# Altium PCB PATTERN-GENERATOR-NODE-NOCTRL-PCB.PcbDoc
Units mm, origin at the board's own origin, x right, y up, seen from the top; angles counter-clockwise.
Board outline 100.5 x 100.5 mm, 2 copper layers (Top Layer, Bottom Layer); 36 components, 19 nets, 113 pads, 6 vias.
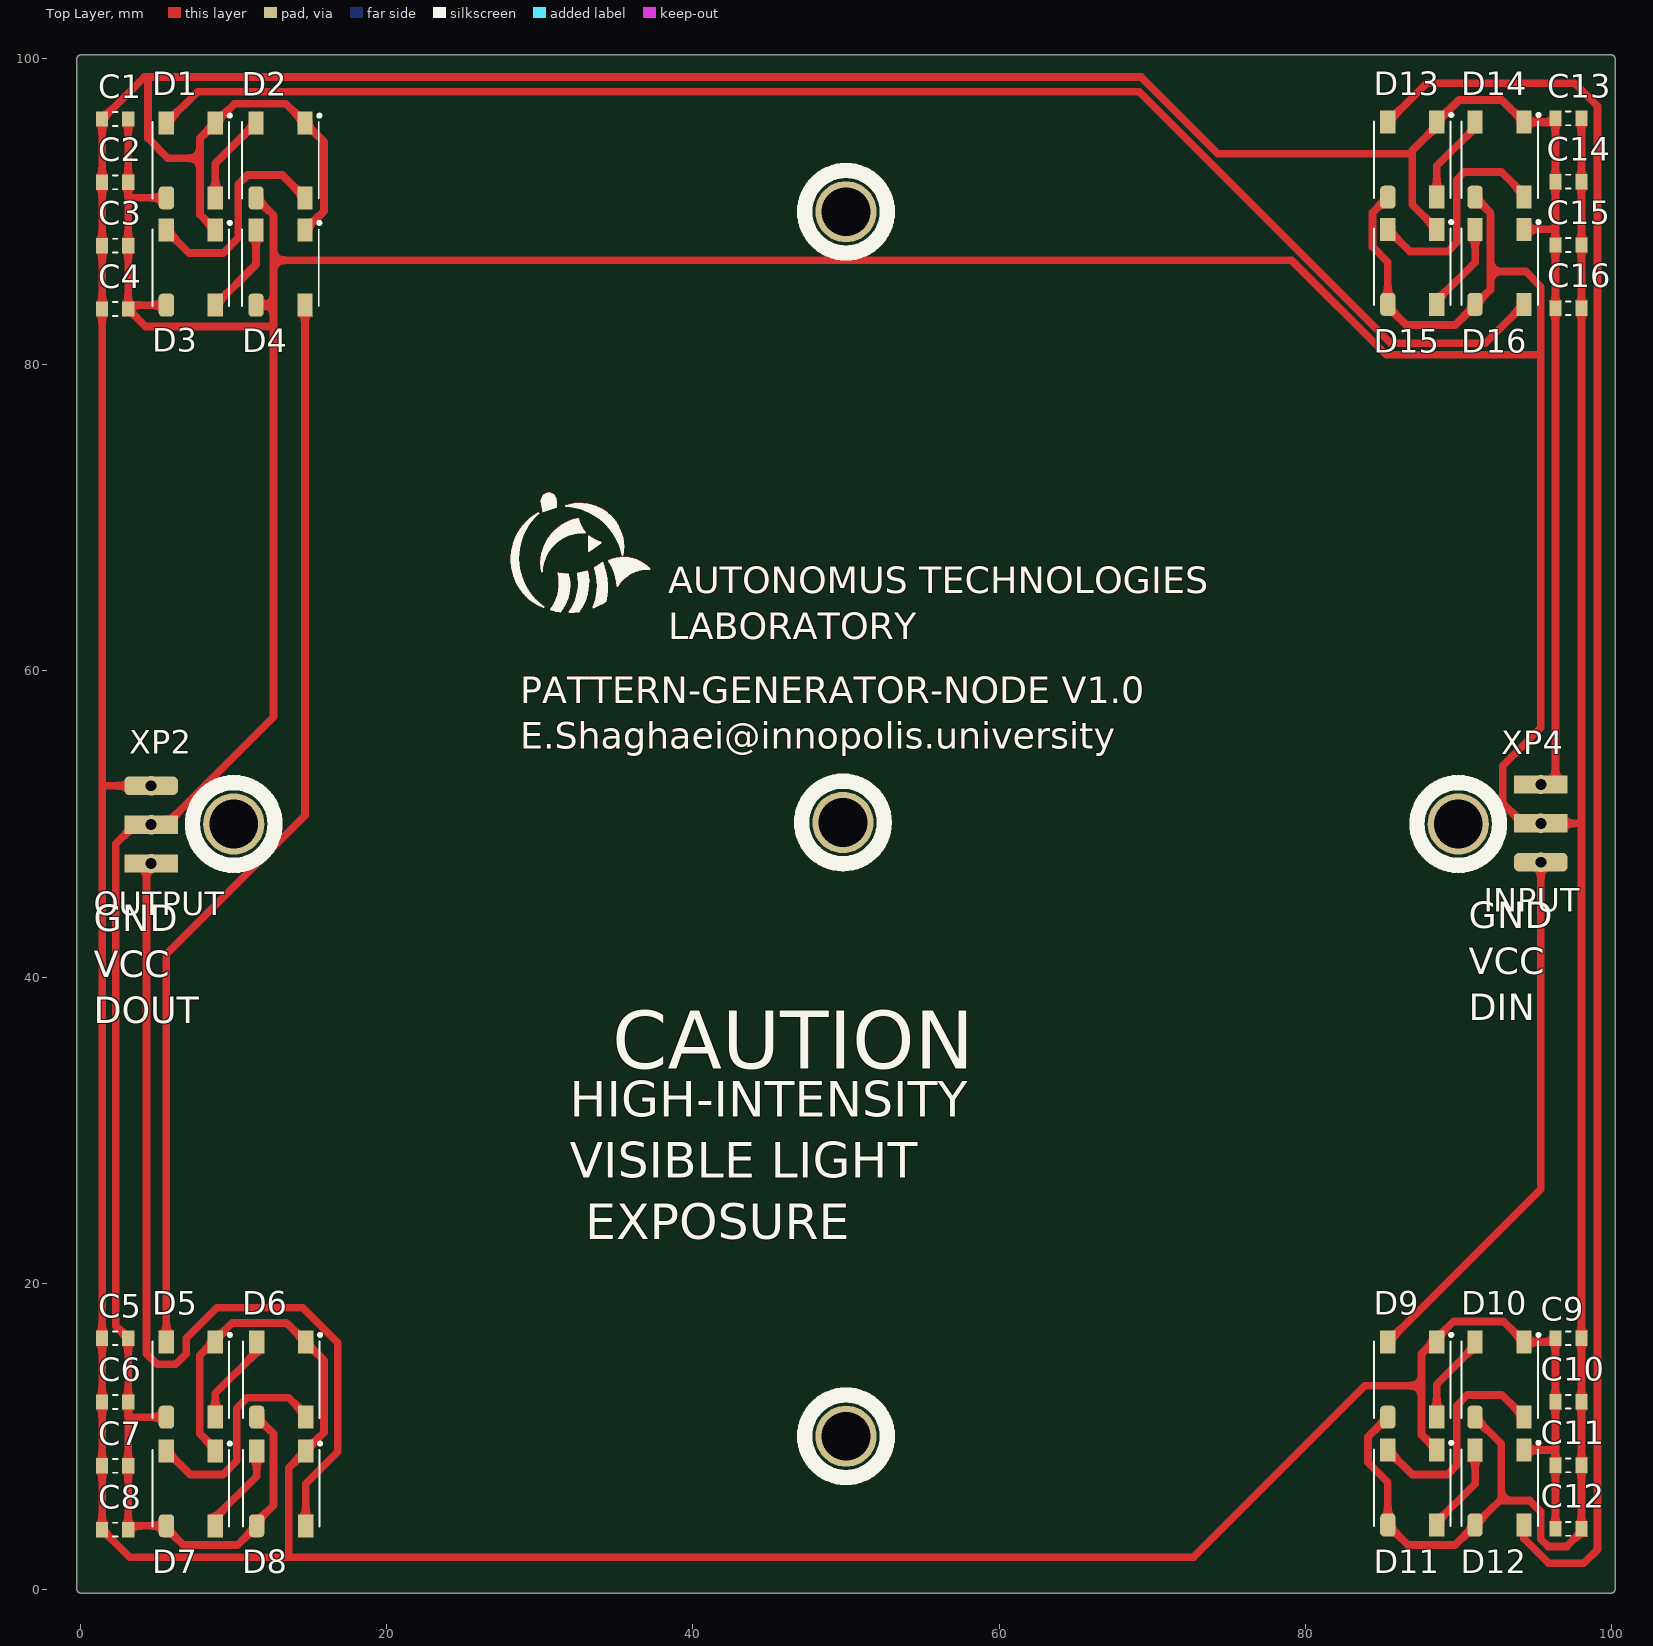
[diagram p0: Top Layer view]
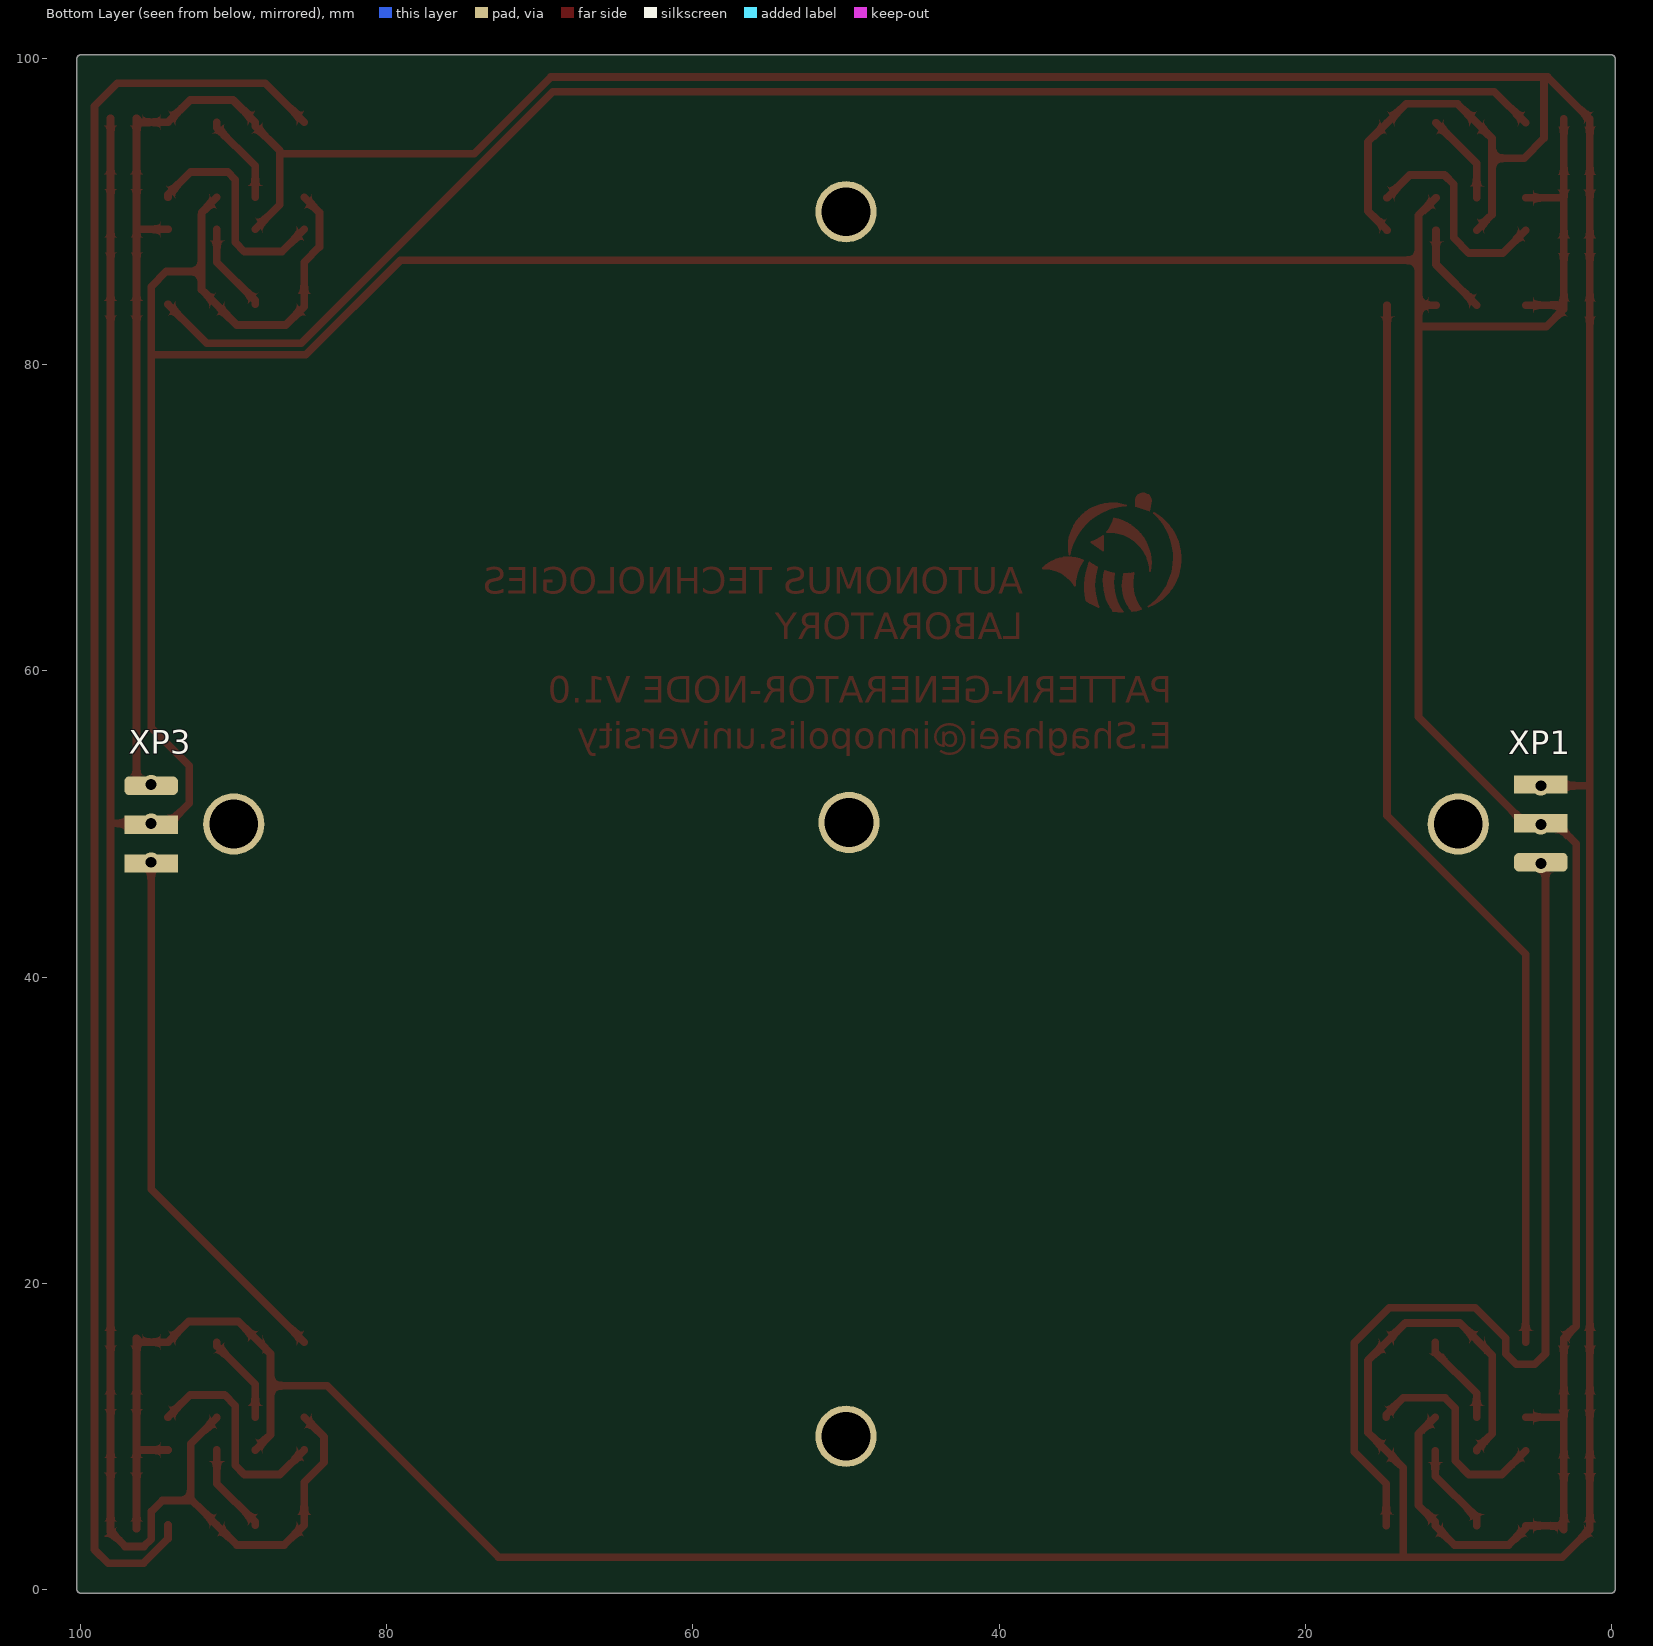
[diagram p1: Bottom Layer view, seen from below]
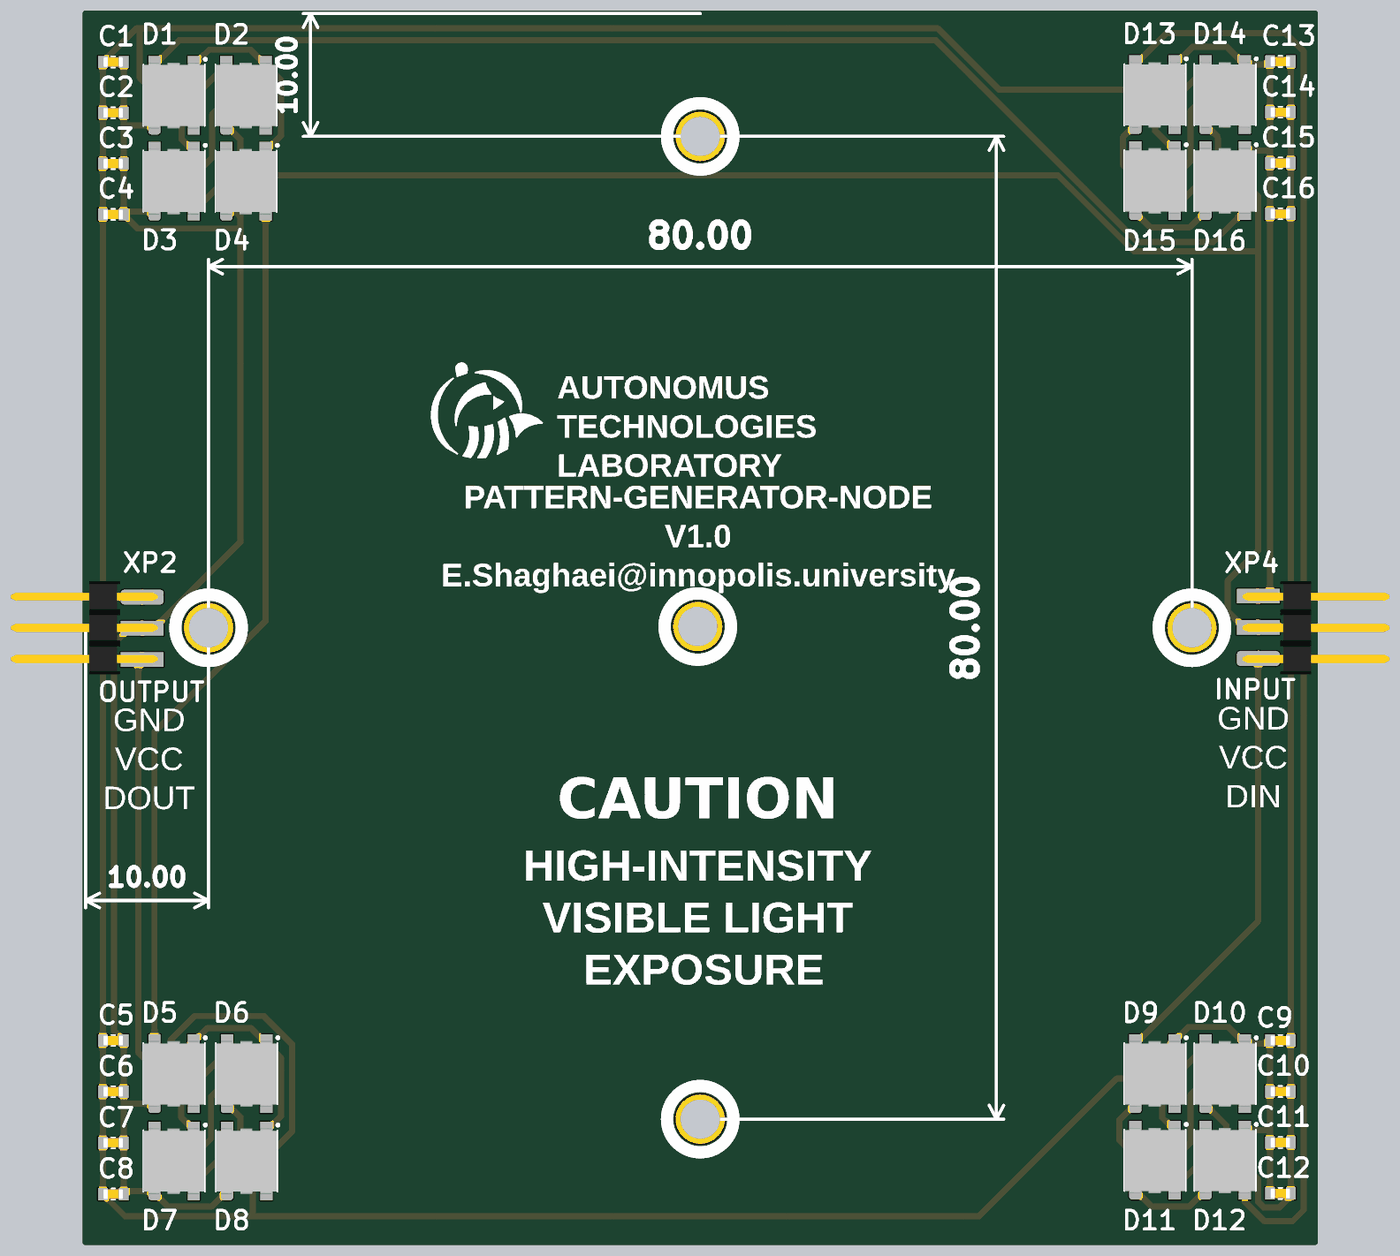
[diagram p2: 3D render of the assembled board from above, using the file's embedded part models]

## Layer stack, top to bottom
Top Solder: solder mask 0.0102, Solder Resist, Dk 3.5
Top Layer: signal copper 0.0356
Dielectric 1: dielectric 0.32, FR-4, Dk 4.8
Bottom Layer: signal copper 0.0356
Bottom Solder: solder mask 0.0102, Solder Resist, Dk 3.5

## Board outline
-0.25,0 ccw(c0,0) 0,-0.25 100,-0.25 ccw(c100,0) 100.25,0 100.25,100 ccw(c100,100) 100,100.25 0,100.25 ccw(c0,100) -0.25,100

## Design rules (kind name [scope] priority, off if disabled: settings)
Clearance [All] p1: gap=0.254 ignorepadtopadclearanceinfootprint=FALSE except(0: Arc-Hole Track-Hole SMDPad-Hole THPad-Hole Via-Hole Fill-Hole Poly-Hole Region-Hole Text-Hole)
PolygonConnect [All] p1: connectstyle=Relief reliefconductorwidth=0.254 reliefentries=4 polygonreliefangle="90 Angle" airgapwidth=0.254
RoutingVias [All] p1: holewidth=0.3 width=0.7 viastyle="Through Hole" minholewidth=0.3 minwidth=0.7 maxholewidth=1 maxwidth=1.5
SolderMaskExpansion [All] p1: expansion=0.102 istentingtop=FALSE
Width [All] p1: maxlimit=5 minlimit=0.17 preferedwidth=0.2
30 further rules are at their usual default settings.

## Components (designator, comment, footprint, x,y, rotation, side; value= is the part's Value field where it differs from the comment)
C1 "GX035C104MAT2-500" *CAPC1608X90 2.25,96.056 r180 top value=0.1u
C2 "GX035C104MAT2-500" *CAPC1608X90 2.25,91.921 r180 top value=0.1u
C3 "GX035C104MAT2-500" *CAPC1608X90 2.25,87.785 r180 top value=0.1u
C4 "GX035C104MAT2-500" *CAPC1608X90 2.25,83.65 r180 top value=0.1u
C5 "GX035C104MAT2-500" *CAPC1608X90 2.25,16.4 r180 top value=0.1u
C6 "GX035C104MAT2-500" *CAPC1608X90 2.25,12.233 r180 top value=0.1u
C7 "GX035C104MAT2-500" *CAPC1608X90 2.25,8.067 r180 top value=0.1u
C8 "GX035C104MAT2-500" *CAPC1608X90 2.25,3.9 r180 top value=0.1u
C9 "GX035C104MAT2-500" *CAPC1608X90 97.2,16.4 r180 top value=0.1u
C10 "GX035C104MAT2-500" *CAPC1608X90 97.2,12.25 r180 top value=0.1u
C11 "GX035C104MAT2-500" *CAPC1608X90 97.2,8.1 r180 top value=0.1u
C12 "GX035C104MAT2-500" *CAPC1608X90 97.2,3.95 r180 top value=0.1u
C13 "GX035C104MAT2-500" *CAPC1608X90 97.2,96.1 r180 top value=0.1u
C14 "GX035C104MAT2-500" *CAPC1608X90 97.2,91.967 r180 top value=0.1u
C15 "GX035C104MAT2-500" *CAPC1608X90 97.2,87.833 r180 top value=0.1u
C16 "GX035C104MAT2-500" *CAPC1608X90 97.2,83.7 r180 top value=0.1u
D1 "WS2812" LED_WS2812 7.2,93.356 r90 top
D2 "WS2812" LED_WS2812 13.053,93.356 r90 top
D3 "WS2812" LED_WS2812 7.2,86.35 r90 top
D4 "WS2812" LED_WS2812 13.053,86.35 r90 top
D5 "WS2812" LED_WS2812 7.2,13.7 r90 top
D6 "WS2812" LED_WS2812 13.1,13.7 r90 top
D7 "WS2812" LED_WS2812 7.2,6.6 r90 top
D8 "WS2812" LED_WS2812 13.1,6.6 r90 top
D9 "WS2812" LED_WS2812 87,13.7 r90 top
D10 "WS2812" LED_WS2812 92.7,13.7 r90 top
D11 "WS2812" LED_WS2812 87,6.65 r90 top
D12 "WS2812" LED_WS2812 92.7,6.65 r90 top
D13 "WS2812" LED_WS2812 87,93.4 r90 top
D14 "WS2812" LED_WS2812 92.7,93.4 r90 top
D15 "WS2812" LED_WS2812 87,86.4 r90 top
D16 "WS2812" LED_WS2812 92.7,86.4 r90 top
XP1 "Header 3" "HDR Side 3 pin" 4.602,50.04 r90 bottom
XP2 "Header 3" "HDR Side 3 pin" 4.602,49.96 r270 top
XP3 "Header 3" "HDR Side 3 pin" 95.398,49.96 r270 bottom
XP4 "Header 3" "HDR Side 3 pin" 95.398,50.04 r90 top

## Footprints (in the part's own frame and the unit in brackets; to place one, negate y for a bottom-side part, rotate by r counter-clockwise, add the part's x,y. Pads: shape width x height; smd on the part's side, far side on the other; paste and mask are expansions set on the pad)
*CAPC1608X90 [mm]
  rect 0.8x1 smd: 1(-0.85,0) 2(0.85,0)
  silkscreen extent -0.15,-0.45 0.15,0.45, body extent -0.8,-0.4 0.8,0.41, height 0.88
"HDR Side 3 pin" [mm]
  rrect50% 1.2x3.5 smd: 1(-2.54,0)
  rect 1.2x3.5 smd: 2(0,0) 3(2.54,0)
  body extent -3.85,-10.67 3.77,1.27, height 1.57
LED_WS2812 [mm]
  rrect50% 1.5x1 smd: 1(-2.45,1.6)
  rect 1.5x1 smd: 2(-2.45,-1.6) 3(2.45,-1.6) 4(2.45,1.6)
  silkscreen extent -2.5,-2.64 3.02,2.5, body extent -2.7,-2.45 2.65,2.5, height 1.5

## Part data
C1 C2 C3 C4 C5 C6 C7 C8 C9 C10 C11 C12 C13 C14 C15 C16: "Cap Thin Film 0.1uf 50v 0603", Package="0603 AVX", MF=AVX, MP="GX035C104MAT2-500 or CL10B104JB8NNNC", Pacage Metric=1608, SnapEDA_Link=https://www.snapeda.com/parts/GX035C104MAT2-500/AVX/view-part/?ref=snap, Type=SMD
D1 D2 D3 D4 D5 D6 D7 D8 D9 D10 D11 D12 D13 D14 D15 D16: "Addressable Lighting - 5 LED Discrete Serial _Shift Register_ Red, Green, Blue _RGB_ 5.00mm Dia", Package="SparkFun Electronics", Availability=Unavailable, ChipDip_Link=https://www.chipdip.ru/product/ws2812b, HelpURL=https://static.chipdip.ru/lib/554/DOC001554925.pdf, MF="SparkFun Electronics", MP=WS2812, Price=None, SnapEDA_Link=https://www.snapeda.com/parts/WS2812/SparkFun%20Electronics/view-part/106391/?ref=snap
XP1 XP2 XP3 XP4: "Header, 3-Pin", LatestRevisionDate=17-Jul-2002, LatestRevisionNote="Re-released for DXP Platform.", Publisher="Altium Limited"

## Free pads (board coordinates)
  round 4 hole 3.2: ""(10,50) ""(49.8,50.1) ""(50,10) ""(50,90) ""(90,50)

## Via types
v1: diameter 1.27, hole 0.711, Top Layer to Bottom Layer, 6 vias

## Nets (pads, with @x,y where several pads share a name; then routed paths per layer and width w, separated by ;. In a path a pad name is that pad's centre, name@x,y a point inside that pad or via, vN(x,y) a via of type N, cw(c..) or ccw(c..) an arc to the next point about the centre after c; other vN are vias at no path point)
DIN: D9.4 XP3.3 XP4.1 | length 35.5
  Top Layer w0.5: D9.4 95.398,26.148 v1(95.398,47.5)
DOUT: D8.2 XP1.1 XP2.3 | length 60.8
  Top Layer w0.5: v1(4.602,47.42) 4.3,47.118 4.3,15.4 5,14.7 6.2,14.7 6.9,15.4 6.9,16.4 8.9,18.4 14.5,18.4 16.8,16.1 16.8,9 14.7,6.9 D8.2
GND: C1.2 C2.2 C3.2 C4.2 C5.2 C6.2 C7.2 C8.2 C9.2 C10.2 C11.2 C12.2 C13.2 C14.2 C15.2 C16.2 D1.3 D2.3 D3.3 D4.3 D5.3 D6.3 D7.3 D8.3 D9.3 D10.3 D11.3 D12.3 D13.3 D14.3 D15.3 D16.3 XP1.3 XP2.1 XP3.1 XP4.3 | length 432.3
  Top Layer w0.5: v1(4.602,52.5) 1.5,52.5 1.4,52.4 ; D7.3 8.8,9.146 7.776,10.17 7.776,15.276 9.904,17.404 13.446,17.404 D6.3 15.9,14.95 15.9,10.25 D8.3 13.6,7.95 13.6,2.2 ; D3.3 7.8,89.8 7.8,89.944 7.796,89.948 7.796,93.5 ; D4.3 15.9,90.047 15.9,94.559 D2.3 13.399,97.06 10.054,97.06 D1.3 7.796,94.802 7.796,93.5 ; 86.9,93.8 74.3,93.8 69.3,98.8 4.5,98.8 ; D11.3 87.6,10.1 87.6,10.287 87.596,10.291 87.596,13.3 ; D15.3 87,90.45 87,94 88.6,95.6 D13.3 90.05,97.3 92.85,97.3 D14.3 96.1,95.85 C13.2 C14.2 96.35,88.8 ; D12.3 96.25,9.1 96.35,9.2 ; D16.3 96.3,88.85 96.35,88.8 ; v1(95.398,52.58) 96.35,52.58 C16.2 C15.2 96.35,88.8 ; C12.2 C11.2 96.35,9.2 ; 1.4,52.4 C4.2 C3.2 C2.2 C1.2 4.144,98.8 4.5,98.8 ; 1.4,52.4 C5.2 C6.2 C7.2 C8.2 3.2,2.1 72.7,2.1 83.9,13.3 87.596,13.3 ; 4.5,98.8 4.4,98.7 4.4,94.8 5.7,93.5 7.796,93.5 ; 87.596,13.3 87.596,15.396 89.7,17.5 92.95,17.5 D10.3 96.1,16.15 C9.2 C10.2 96.35,9.2
NetD1_2: D1.2 D2.4 | length 6
  Top Layer w0.5: D1.2 8.8,93.153 D2.4
NetD1_4: D1.4 D16.2 | length 97.4
  Top Layer w0.5: D1.4 7.64,97.847 69.153,97.847 85.6,81.4 91.75,81.4 D16.2
NetD2_2: D2.2 D3.4 | length 14.5
  Top Layer w0.5: D3.4 7.1,87.3 9.3,87.3 10.3,88.3 10.3,91.8 10.9,92.4 13.159,92.4 D2.2
NetD3_2: D3.2 D4.4 | length 6
  Top Layer w0.5: D3.2 11.453,86.553 D4.4
NetD4_2: D4.2 D5.4 | length 71.5
  Top Layer w0.5: D5.4 5.6,41.5 14.653,50.553 D4.2
NetD5_2: D5.2 D6.4 | length 6
  Top Layer w0.5: D5.2 8.8,12.8 11.5,15.5 D6.4
NetD6_2: D6.2 D7.4 | length 14.4
  Top Layer w0.5: D7.4 7.15,7.5 9.3,7.5 10.2,8.4 10.2,11.838 10.87,12.509 13.598,12.509 14.7,11.406 D6.2
NetD7_2: D7.2 D8.4 | length 6
  Top Layer w0.5: D7.2 8.8,4.7 11.5,7.4 D8.4
NetD9_2: D9.2 D10.4 | length 5.9
  Top Layer w0.5: D9.2 88.6,13.4 91.1,15.9 D10.4
NetD10_2: D10.2 D11.4 | length 14.6
  Top Layer w0.5: D11.4 87,7.5 89.3,7.5 89.9,8.1 89.9,12 90.6,12.7 92.85,12.7 D10.2
NetD11_2: D11.2 D12.4 | length 5.9
  Top Layer w0.5: D11.2 88.6,4.4 91.1,6.9 D12.4
NetD12_2: D12.2 D13.4 | length 116.4
  Top Layer w0.5: D13.4 87.95,98.4 97.6,98.4 99.1,96.9 99.1,2.6 98.2,1.7 95.9,1.7 94.3,3.3 D12.2
NetD13_2: D13.2 D14.4 | length 5.9
  Top Layer w0.5: D13.2 88.6,93 91.1,95.5 D14.4
NetD14_2: D14.2 D15.4 | length 14.8
  Top Layer w0.5: D15.4 86.85,87.4 89.3,87.4 89.9,88 89.9,92.1 90.4,92.6 92.8,92.6 94.3,91.1 D14.2
NetD15_2: D15.2 D16.4 | length 5.9
  Top Layer w0.5: D15.2 88.6,84.2 91.1,86.7 D16.4
VCC: C1.1 C2.1 C3.1 C4.1 C5.1 C6.1 C7.1 C8.1 C9.1 C10.1 C11.1 C12.1 C13.1 C14.1 C15.1 C16.1 D1.1 D2.1 D3.1 D4.1 D5.1 D6.1 D7.1 D8.1 D9.1 D10.1 D11.1 D12.1 D13.1 D14.1 D15.1 D16.1 XP1.2 XP2.2 XP3.2 XP4.2 | length 416.1
  Top Layer w0.5: C1.1 C2.1 3.1,90.9 ; D5.1 3.25,11.25 3.1,11.1 ; D3.1 3.35,83.9 C4.1 ; D1.1 3.106,90.906 3.1,90.9 ; D4.1 12.6,83.9 ; D2.1 12.6,89.759 12.6,86.83 ; D6.1 12.6,10.15 12.6,5.5 11.5,4.4 D8.1 10.25,2.9 9.513,2.9 9.509,2.896 8.091,2.896 8.087,2.9 6.7,2.9 5.6,4 D7.1 3.35,4.15 C8.1 C7.1 3.1,11.1 ; D9.1 84.1,9.95 84.1,8.3 85.4,7 D11.1 86.7,2.9 89.8,2.9 D12.1 92.1,5.2 92.7,5.8 92.8,5.8 ; D13.1 84.4,89.95 84.4,89.813 84.396,89.809 84.396,87.891 84.4,87.887 84.4,87.7 85.4,86.7 D15.1 85.4,83.8 86.6,82.6 89.8,82.6 92.104,84.904 92.104,86.1 ; D10.1 91.1,11.2 92.8,9.5 92.8,5.8 ; D14.1 92.1,89.95 92.1,89.813 92.104,89.809 92.104,86.1 ; XP4.2@93.867,50.398 92.9,51.365 92.9,53.8 95.394,56.294 95.394,80.7 ; v1(95.398,50.04) 97.79,50.04 ; C13.1 C14.1 C15.1 C16.1 C9.1 C10.1 C11.1 C12.1 98.05,3.75 97.1,2.8 95.866,2.8 95.383,3.283 95.383,5.08 94.663,5.8 92.8,5.8 ; 3.1,11.1 C6.1 C5.1 2.3,17.2 2.3,48.7 3.56,49.96 v1(4.602,49.96) 5.56,49.96 12.6,57 12.6,82.3 ; C4.1 C3.1 3.1,90.9 ; C4.1 4.25,82.5 12.4,82.5 12.6,82.3 ; 12.6,82.3 12.6,83.9 ; 12.6,83.9 12.6,86.83 ; 12.6,86.83 79.104,86.83 85.288,80.646 95.34,80.646 95.394,80.7 ; 92.104,86.1 94.4,86.1 95.394,85.106 95.394,80.7
copper on no net: | length 69
  Top Layer w0.01: 30.068,71.131 30.196,70.441 31.079,70.737 31.083,71.131 ; 30.069,71.089 cw(c30.575,71.131) 31.08,71.081
  Top Layer w0.127: 34.081,67.078 cw(c29.979,65.474) 34.295,64.595 cw(c31.901,68.167) 33.49,64.171 ccw(c30.202,65.593) 33.588,66.761 ccw(c31.882,69.949) 34.081,67.078 ; 29.376,64.686 cw(c31.583,67.326) 29.896,70.325 ccw(c32.482,67.398) 30.238,64.201 cw(c31.901,68.167) 29.376,64.686 ; 30.127,66.512 cw(c32.789,66.413) 32.943,69.073 cw(c34.558,70.485) 32.479,69.954 ccw(c33.05,67.039) 30.127,66.512 ; 30.719,64.032 ccw(c28.506,65.725) 31.21,66.396 ccw(c31.882,69.949) 31.828,66.333 cw(c29.274,65.612) 31.309,63.908 cw(c31.901,68.167) 30.719,64.032 ; 31.716,70.805 cw(c32.616,68.119) 35.401,67.598 ccw(c31.498,66.835) 31.716,70.805 ; 31.915,63.867 ccw(c29.396,65.761) 32.486,66.384 ccw(c31.882,69.949) 33.091,66.541 cw(c29.872,65.843) 32.542,63.915 cw(c31.901,68.167) 31.915,63.867 ; 33.208,67.862 33.974,68.421 cw(c34.558,70.485) 33.208,68.818 33.208,67.862 ; 34.511,67.212 cw(c35.468,65.102) 37.146,66.699 ccw(c37.069,64.33) 35.052,65.573 ccw(c32.108,65.51) 34.511,67.212

## Other copper
Top Layer:
  region: 35.052,65.573 ccw(c32.108,65.51) 34.511,67.212 cw(c35.468,65.102) 37.146,66.699 ccw(c37.069,64.33)
  region: 35.401,67.598 ccw(c32.616,68.119) 31.716,70.805 cw(c31.498,66.835)
  region: 30.127,66.512 cw(c33.05,67.039) 32.479,69.954 ccw(c34.558,70.485) 32.943,69.073 ccw(c32.789,66.413)
  region: 30.19,70.44 30.071,71.084 cw(c30.069,71.089) 30.064,71.089 cw(c30.575,71.131) 31.088,71.131 cw(c31.083,71.131) 31.088,71.131 cw(c30.575,71.131) 31.088,71.121 31.088,71.131 ccw(c30.575,71.131) 31.088,71.131 31.088,71.121 31.084,70.737 ccw(c31.079,70.737) 31.084,70.737 cw(c31.079,70.737) 31.08,70.732 30.197,70.436 cw(c30.196,70.441)
  region: 30.238,64.201 cw(c31.901,68.167) 29.376,64.686 cw(c31.583,67.326) 29.896,70.325 ccw(c32.482,67.398)
  region: 30.719,64.032 ccw(c31.901,68.167) 31.309,63.908 ccw(c29.274,65.612) 31.828,66.333 cw(c31.882,69.949) 31.21,66.396 cw(c28.506,65.725)
  region: 31.915,63.867 ccw(c31.901,68.167) 32.542,63.915 ccw(c29.872,65.843) 33.091,66.541 cw(c31.882,69.949) 32.486,66.384 cw(c29.396,65.761)
  region: 33.49,64.171 ccw(c31.901,68.167) 34.295,64.595 ccw(c29.979,65.474) 34.081,67.078 cw(c31.882,69.949) 33.588,66.761 cw(c30.202,65.593)
  region: 33.974,68.421 cw(c34.558,70.485) 33.208,68.818 33.208,67.862
  text "AUTONOMUS TECHNOLOGIES / LABORATORY" at 38.43,61.468 h3
  text "PATTERN-GENERATOR-NODE V1.0 / E.Shaghaei@innopolis.university" at 28.687,54.344 h3

## Silkscreen, mask and mechanical layers (free items; w line width, h text height)
Top Overlay:
  circle w1: c49.8,50.1 r2.7
  circle w1: c50,90 r2.7
  circle w1: c90,50 r2.7
  circle w1: c10,50 r2.7
  circle w1: c50,10 r2.7
  region: 30.242,64.171 cw(c31.904,68.137) 29.379,64.656 cw(c31.587,67.296) 29.899,70.294 ccw(c32.486,67.368)
  region: 30.194,70.41 30.074,71.054 cw(c30.073,71.059) 30.067,71.058 cw(c30.579,71.101) 31.092,71.101 cw(c31.086,71.101) 31.092,71.1 cw(c30.579,71.101) 31.091,71.09 31.092,71.1 ccw(c30.579,71.101) 31.092,71.101 31.091,71.09 31.088,70.707 ccw(c31.082,70.707) 31.088,70.707 cw(c31.082,70.707) 31.084,70.702 30.201,70.406 cw(c30.199,70.411)
  region: 30.13,66.482 cw(c33.054,67.009) 32.483,69.924 ccw(c34.562,70.454) 32.946,69.043 ccw(c32.793,66.382)
  region: 35.404,67.568 ccw(c32.619,68.088) 31.719,70.775 cw(c31.502,66.804)
  region: 33.977,68.39 cw(c34.562,70.454) 33.211,68.788 33.211,67.832
  region: 31.918,63.837 ccw(c31.904,68.137) 32.546,63.885 ccw(c29.875,65.813) 33.094,66.511 cw(c31.886,69.918) 32.489,66.353 cw(c29.4,65.731)
  region: 30.722,64.002 ccw(c31.904,68.137) 31.312,63.878 ccw(c29.278,65.581) 31.831,66.303 cw(c31.886,69.918) 31.213,66.366 cw(c28.509,65.694)
  region: 35.055,65.543 ccw(c32.112,65.48) 34.515,67.181 cw(c35.471,65.072) 37.149,66.668 ccw(c37.073,64.3)
  region: 33.493,64.141 ccw(c31.904,68.137) 34.299,64.565 ccw(c29.983,65.443) 34.084,67.048 cw(c31.886,69.918) 33.592,66.731 cw(c30.206,65.563)
  lines w0.01: 30.071,71.101 30.199,70.411 31.082,70.707 31.086,71.101 ; 30.073,71.059 cw(c30.579,71.101) 31.084,71.05
  lines w0.127: 29.379,64.656 cw(c31.587,67.296) 29.899,70.294 ccw(c32.486,67.368) 30.242,64.171 cw(c31.904,68.137) 29.379,64.656 ; 30.13,66.482 cw(c33.054,67.009) 32.483,69.924 ccw(c34.562,70.454) 32.946,69.043 ccw(c32.793,66.382) 30.13,66.482 ; 30.722,64.002 ccw(c31.904,68.137) 31.312,63.878 ccw(c29.278,65.581) 31.831,66.303 cw(c31.886,69.918) 31.213,66.366 cw(c28.509,65.694) 30.722,64.002 ; 31.719,70.775 cw(c31.502,66.804) 35.404,67.568 ccw(c32.619,68.088) 31.719,70.775 ; 31.918,63.837 ccw(c31.904,68.137) 32.546,63.885 ccw(c29.875,65.813) 33.094,66.511 cw(c31.886,69.918) 32.489,66.353 cw(c29.4,65.731) 31.918,63.837 ; 33.211,67.832 33.211,68.788 ccw(c34.562,70.454) 33.977,68.39 33.211,67.832 ; 33.493,64.141 ccw(c31.904,68.137) 34.299,64.565 ccw(c29.983,65.443) 34.084,67.048 cw(c31.886,69.918) 33.592,66.731 cw(c30.206,65.563) 33.493,64.141 ; 34.515,67.181 cw(c35.471,65.072) 37.149,66.668 ccw(c37.073,64.3) 35.055,65.543 ccw(c32.112,65.48) 34.515,67.181
  text "AUTONOMUS TECHNOLOGIES / LABORATORY" at 38.4,61.498 h3
  text "PATTERN-GENERATOR-NODE V1.0 / E.Shaghaei@innopolis.university" at 28.716,54.313 h3
  text "INPUT" at 91.654,44.254 h1.52
  text "OUTPUT" at 0.854,44.054 h1.52
  text "GND / VCC / DIN" at 90.683,36.6 h3
  text "GND / VCC / DOUT" at 0.854,36.4 h3
  text "CAUTION" at 34.732,32.771 h6.5
  text "HIGH-INTENSITY  / VISIBLE LIGHT /  EXPOSURE" at 31.939,22.1 h4
Mechanical 1:
  lines w0.5: 100,9.144 100,0 ; 100,0 100,100 0,100 0,0 100,0

## Dimensions
50,90 to 50,10 on Top Overlay
10,50 to 90,50 on Top Overlay
10,50 to 0,100 on Top Overlay
50,90 to 0,100 on Top Overlay